# Altium PCB WEB_PCB.PcbDoc (part 1 of 2)
Units mil, origin at the board's own origin, x right, y up, seen from the top; angles counter-clockwise.
Board outline 3858.27 x 2755.91 mil, 2 copper layers (Top Layer, Bottom Layer); 107 components, 108 nets, 503 pads, 381 vias.
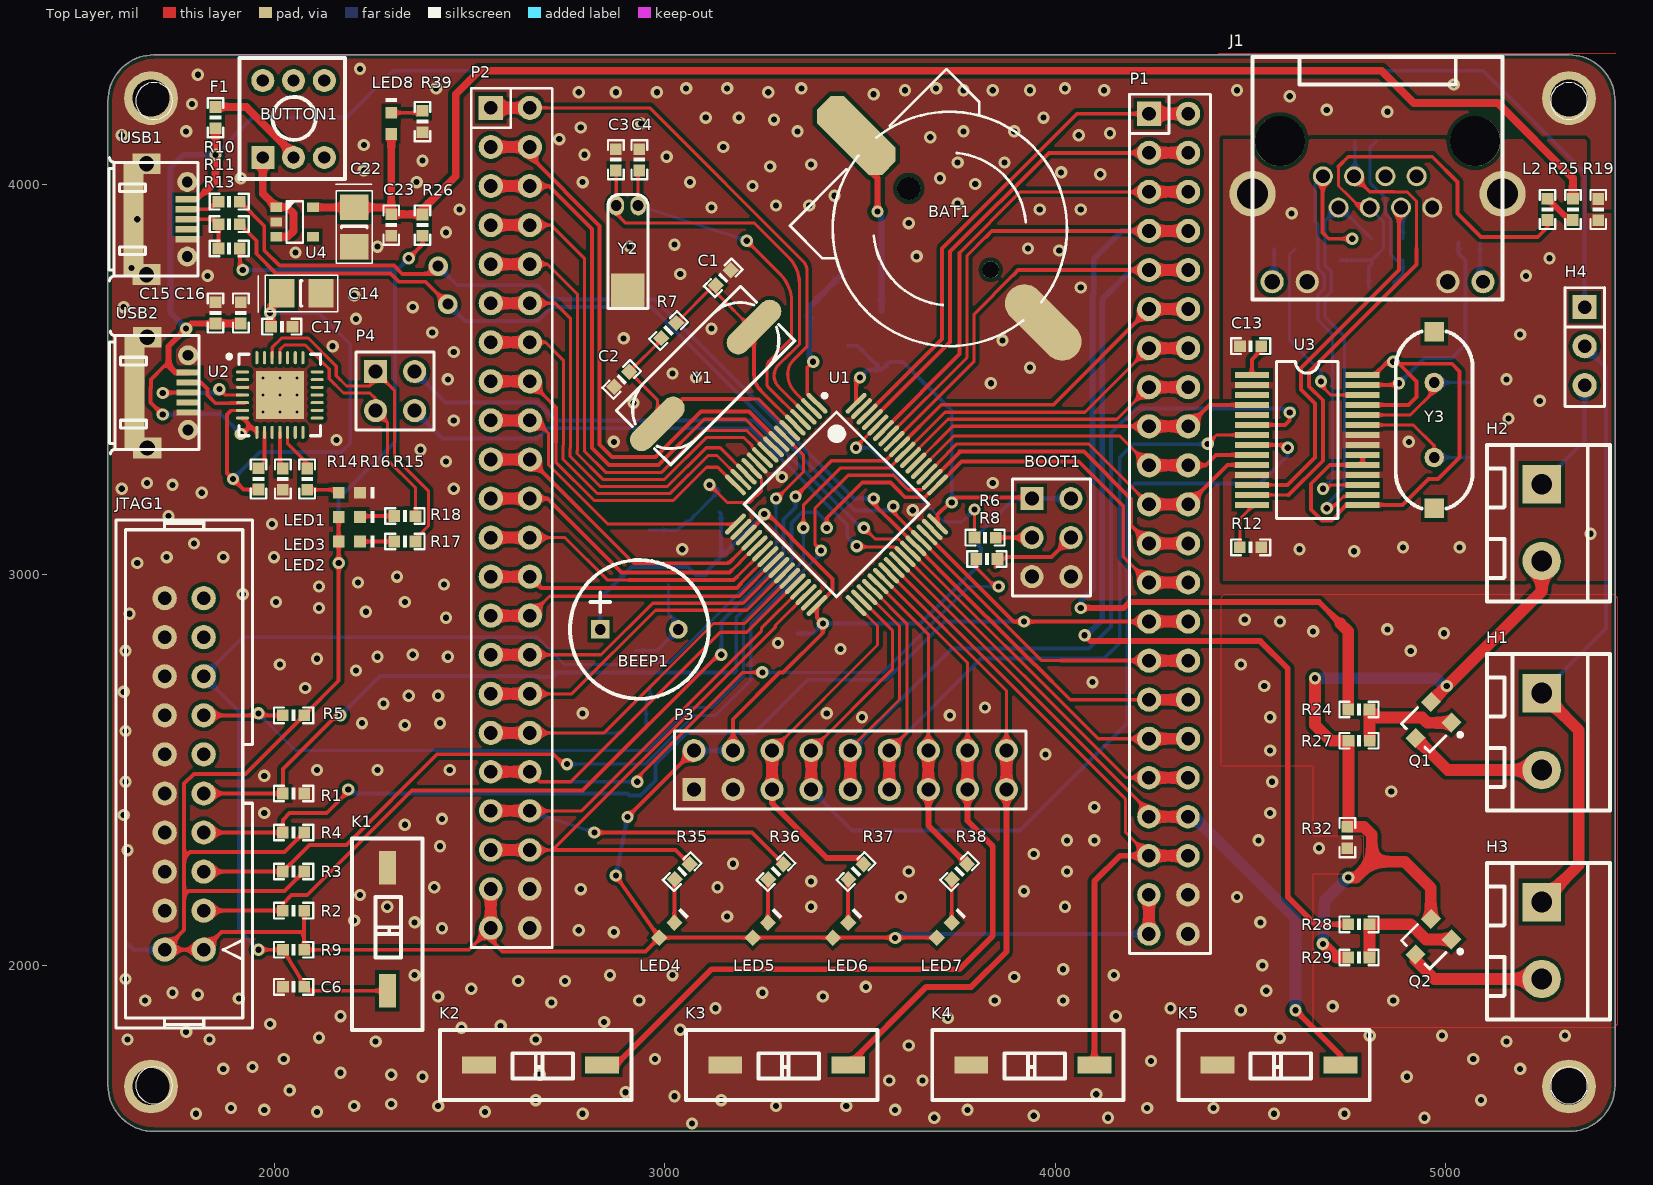
[diagram p0: Top Layer view]
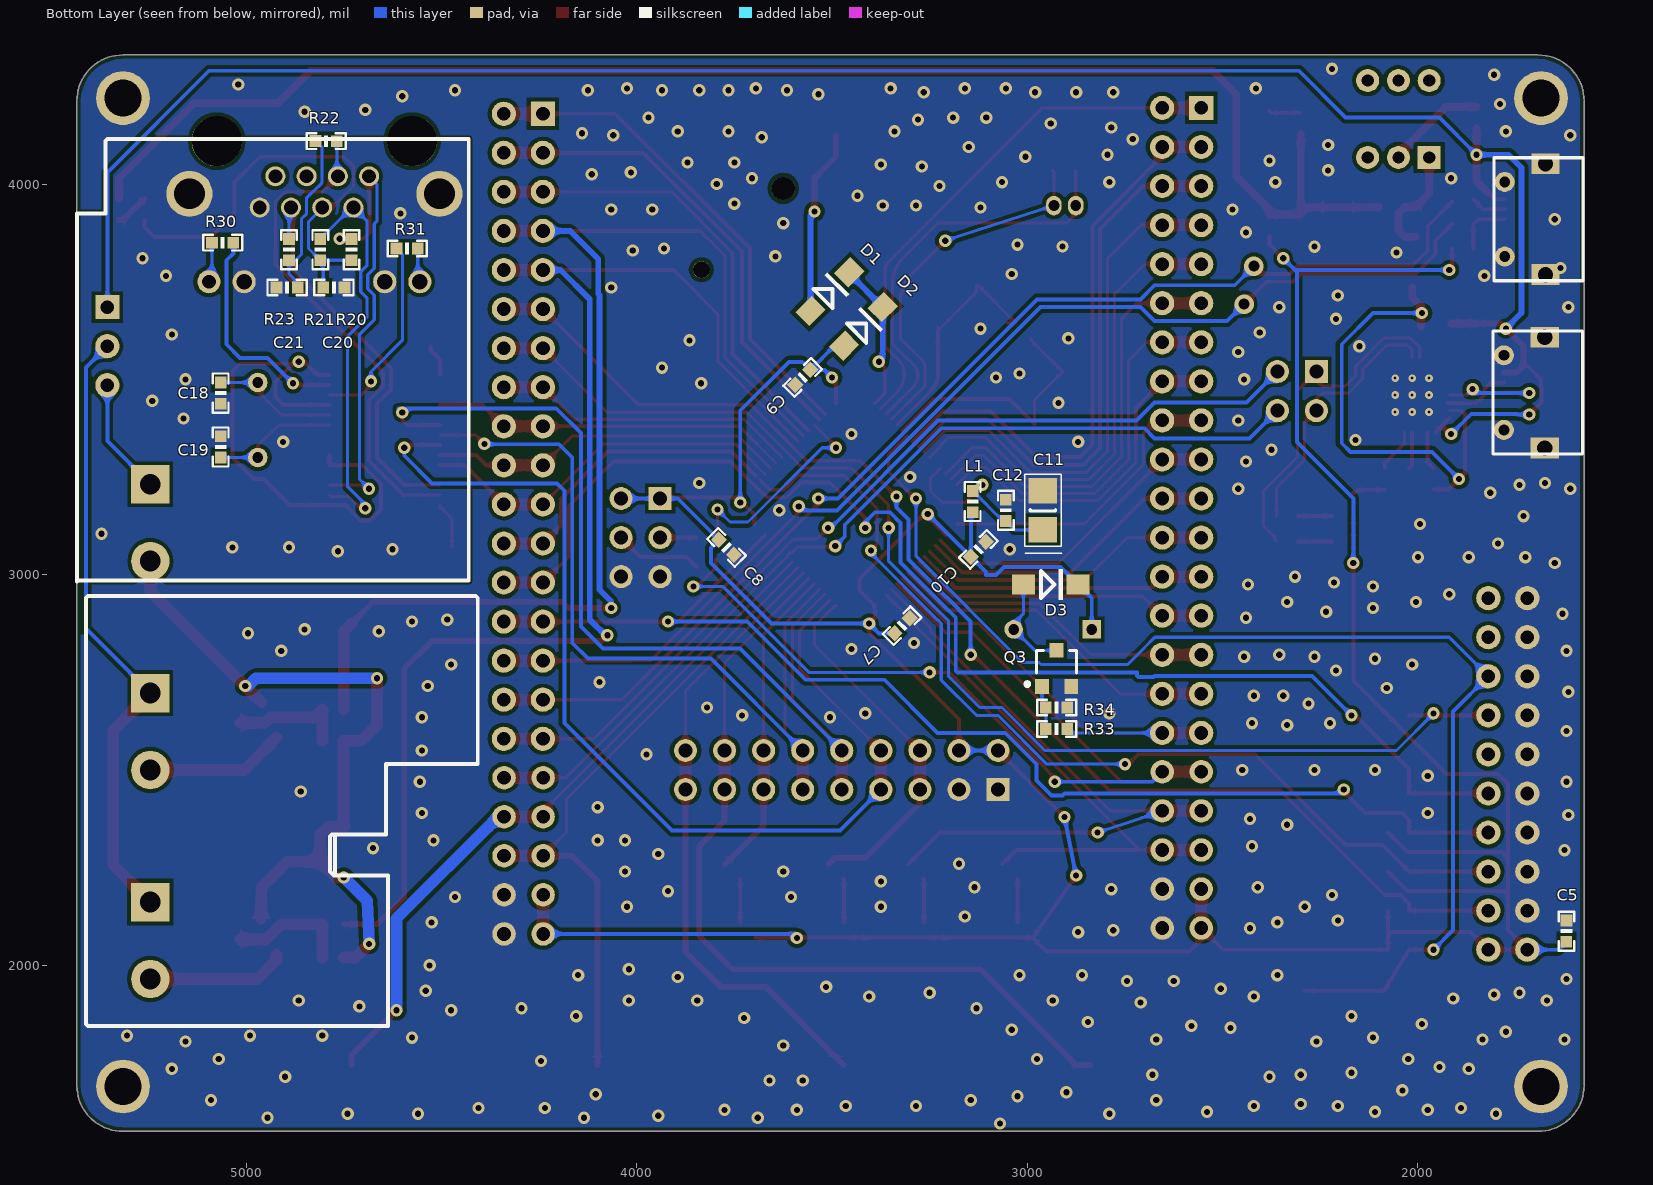
[diagram p1: Bottom Layer view, seen from below]

## Layer stack, top to bottom
Top Solder: solder mask 0.4, Solder Resist, Dk 3.5
Top Layer: signal copper 1.4
Dielectric 1: dielectric 12.6, FR-4, Dk 4.8
Bottom Layer: signal copper 1.4
Bottom Solder: solder mask 0.4, Solder Resist, Dk 3.5

## Board outline
1574.8,1692.91 1574.8,4212.6 cw(c1692.91,4212.6) 1692.91,4330.71 5314.96,4330.71 cw(c5314.96,4212.6) 5433.07,4212.6 5433.07,1692.91 cw(c5314.96,1692.91) 5314.96,1574.8 1692.91,1574.8 cw(c1692.91,1692.91)

## Design rules (kind name [scope] priority, off if disabled: settings)
Clearance Clearance_3 [HasFootprint('SSOP28') vs HasFootprint('SSOP28')] p1: gap=10
Clearance Clearance_2 [HasFootprint('STM-LQFP64_N')] p2: gap=10 except(5: SMDPad-SMDPad; 8: Track-SMDPad; 9: Track-Track)
Clearance Clearance_1 [HasFootprint('USB-MICRO-5P-2') vs HasFootprint('USB-MICRO-5P-2')] p3: gap=10 except(8: SMDPad-SMDPad)
Clearance [All] p4: gap=10
DiffPairsRouting DiffPairsRouting_1 [InDifferentialPairClass('USART_Class')] p1: maxlimit=10 minlimit=10 mostfreqgap=10 toplayer_minwidth=8 toplayer_maxwidth=15 toplayer_prefwidth=15 bottomlayer_minwidth=8 bottomlayer_maxwidth=15 bottomlayer_prefwidth=15 maxuncoupledlength=500
DiffPairsRouting [All] p2: maxlimit=10 minlimit=10 mostfreqgap=10 toplayer_minwidth=15 toplayer_maxwidth=15 toplayer_prefwidth=15 bottomlayer_minwidth=15 bottomlayer_maxwidth=15 bottomlayer_prefwidth=15 maxuncoupledlength=500
HoleSize [All] p1: absolutevalues=TRUE maxlimit=10000 minlimit=1 maxpercent=80.000 minpercent=20.000
MinimumSolderMaskSliver MinimumSolderMaskSliver_5 [HasFootprint('XTAL32') vs HasFootprint('XTAL32')] p1: minsoldermaskwidth=5
MinimumSolderMaskSliver MinimumSolderMaskSliver_4 [HasFootprint('SOT23-5') vs HasFootprint('SOT23-5')] p2: minsoldermaskwidth=5
MinimumSolderMaskSliver MinimumSolderMaskSliver_3 [HasFootprint('SLAB-QFN-28-3125x3125TP_N') vs HasFootprint('SLAB-QFN-28-3125x3125TP_N')] p3: minsoldermaskwidth=2
MinimumSolderMaskSliver MinimumSolderMaskSliver_2 [HasFootprint('SSOP28') vs HasFootprint('SSOP28')] p4: minsoldermaskwidth=2
MinimumSolderMaskSliver MinimumSolderMaskSliver_1 [HasFootprint('USB-MICRO-5P-2')] p5: minsoldermaskwidth=1
MinimumSolderMaskSliver [All] p6: minsoldermaskwidth=10
PolygonConnect [All] p1: connectstyle=Direct reliefconductorwidth=10 reliefentries=4 polygonreliefangle="90 Angle" airgapwidth=10
RoutingVias [All] p1: holewidth=28 width=50 viastyle="Through Hole" minholewidth=28 minwidth=50 maxholewidth=28 maxwidth=50
SilkToSilkClearance SilkToSilkClearance_1 [All] p1: silktosilkclearance=0
SilkToSilkClearance [All] p2: silktosilkclearance=10
SilkToSolderMaskClearance SilkToSolderMaskClearance_1 [IsPad] p1: minsilkscreentomaskgap=0 clearancetoexposedcopper=TRUE
SilkToSolderMaskClearance [IsPad] p2: minsilkscreentomaskgap=10 clearancetoexposedcopper=TRUE
SolderMaskExpansion [All] p1: expansion=4
Width Width_1 [InNetClass('NETS_Power')] p1: maxlimit=10000 minlimit=8 preferedwidth=20
Width [All] p2: maxlimit=99999 minlimit=8 preferedwidth=10
25 further rules are at their usual default settings.

## Classes and differential pairs
component class mcu_sys_sch: BAT1 BOOT1 C1 C2 C3 C4 C5 C6 C7 C8 C9 C10 C11 C12 D1 D2 JTAG1 K1 L1 P1 P2 P3 R1 R2 R3 R4 R5 R6 R7 R8 R9 U1 Y1 Y2
component class web_sch: BEEP1 BUTTON1 C13 C14 C15 C16 C17 C18 C19 C20 C21 C22 C23 D3 F1 H1 H2 H3 H4 J1 K2 K3 K4 K5 L2 LED1 LED2 LED3 LED4 LED5 LED6 LED7 LED8 P4 Q1 Q2 Q3 R10 R11 R12 R13 R14 R15 R16 R17 R18 R19 R20 R21 R22 R23 R24 R25 R26 R27 R28 R29 R30 R31 R32 R33 R34 R35 R36 R37 R38 R39 U2 U3 U4 USB1 USB2 Y3
differential pair class USART_Class: CP_USART NewDifferentialPair1 UART

## Components (designator, comment, footprint, x,y, rotation, side; value= is the part's Value field where it differs from the comment)
BAT1 "BATT" BATM 3730,3885 r225 top locked
BEEP1 "BEEP" BELL-5 2835,2860 r0 top locked
BOOT1 "Header 3X2" HDR2X3 3940,3195 r270 top
BUTTON1 "BUTTON2" BTN8.5*8.5 1971.26,4068.15 r90 top
C1 "22" 0603P 3150,3760 r225 top
C2 "22" 0603P 2890,3499.91 r45 top
C3 "22" 0603P 2875.06,4062.5 r270 top
C4 "22" 0603P 2935.06,4062.5 r270 top
C5 "104" 0603P 1620.06,2087.5 r90 bottom
C6 "104" 0603P 2050,1945 r0 top
C7 "104" 0603P 3320.51,2869.4 r315 bottom
C8 "104" 0603P 3770,3070 r45 bottom
C9 "104" 0603P 3575,3505 r135 bottom
C10 "104" 0603P 3125,3065 r315 bottom
C11 "10uF" TAJ_A 2960,3165 r90 bottom
C12 "104" 0603P 3055,3165 r270 bottom
C13 "104" 0603P 4500,3585 r0 top
C14 "4.7u" TAJ_A 2070,3720 r0 top
C15 "1u" 0603P 1850,3670 r90 top
C16 "0.1u" 0603P 1915,3670 r90 top
C17 "0.1u" 0603P 2020,3635 r180 top
C18 "22" 0603P 5064.87,3465 r270 bottom
C19 "22" 0603P 5065,3327 r90 bottom
C20 "104" 0603P 4775,3735 r0 bottom
C21 "104" 0603P 4895,3735.06 r180 bottom
C22 "10uF" TAJ_A 2205,3890 r270 top
C23 "104" 0603P 2300,3895 r90 top
D1 "1N4148" DIODE_SOP 3555,3675 r135 bottom
D2 "1N4148" DIODE_SOP 3468.99,3586.01 r135 bottom
D3 "1N4148" DIODE_SOP 3010,2975 r180 bottom
F1 "Fuse 1" 0603P 1850,4170 r90 top
H1 "HEAD2" HEAD2L-0.8 5245,2696.85 r270 top
H2 "HEAD2" HEAD2L-0.8 5245,3231.85 r270 top
H3 "HEAD2" HEAD2L-0.8 5245,2161.85 r270 top
H4 "Header 3" HEAD3 5354.57,3685.43 r270 top
J1 "RJ45" RJ8-1 4685,4020 r0 top locked
JTAG1 "JTAG" JTAG_20 1770,2490 r90 top
K1 "KEY" KEY2 2290,2250 r270 top
K2 "KEY" KEY2 2839.96,1745 r180 top
K3 "KEY" KEY2 3469.97,1745 r180 top
K4 "KEY" KEY2 4099.99,1745 r180 top
K5 "KEY" KEY2 4730,1745 r180 top
L1 "221" 0603P 3139.94,3187.5 r270 bottom
L2 "100uH" 0603P 5260,3935 r90 top
LED1 "LED" LED_0603 2192.5,3210.13 r0 top
LED2 "LED" LED_0603 2192.5,3085.06 r0 top
LED3 "LED" LED_0603 2192.5,3147.6 r0 top
LED4 "LED" LED_0603 3005.51,2090 r45 top
LED5 "LED" LED_0603 3245,2090 r45 top
LED6 "LED" LED_0603 3450,2090 r45 top
LED7 "LED" LED_0603 3715.51,2090 r45 top
LED8 "LED" LED_0603 2300,4155 r90 top
P1 "HEAD2*22" HEAD2*22 4239.57,4180.43 r270 top locked
P2 "HEAD2*22" HEAD2*22 2554.57,4195.43 r270 top
P3 "Header 9X2" HDR2X9 3075,2450 r0 top
P4 "Header 2X2" HDR2X2 2260,3520 r270 top
Q1 "MOSFET-N" SOT-23 4955,2615 r135 top
Q2 "MOSFET-N" SOT-23 4955,2060 r135 top
Q3 "MOSFET-P" SOT-23 2925,2760 r180 bottom
R1 "10K" 0603P 2050,2440 r180 top
R2 "10K" 0603P 2050,2140 r180 top
R3 "10K" 0603P 2050,2240 r180 top
R4 "10K" 0603P 2050,2340 r180 top
R5 "10K" 0603P 2050,2640 r180 top
R6 "10K" 0603P 3820,3095 r0 top
R7 "1M" 0603P 3010,3625 r45 top
R8 "10K" 0603P 3825,3040 r180 top
R9 "10K" 0603P 2050,2040 r0 top
R10 "33" 0603P 1885,3955 r0 top
R11 "33" 0603P 1885,3897.5 r0 top
R12 "2.32k" 0603P 4500,3070 r180 top
R13 "1.5K" 0603P 1885,3835 r0 top
R14 "10K" 0603P 1960,3245 r90 top
R15 "10K" 0603P 2085,3245 r270 top
R16 "10K" 0603P 2022.56,3245 r270 top
R17 "470" 0603P 2335,3085 r180 top
R18 "470" 0603P 2335,3150 r180 top
R19 "0" 0603P 5390,3935 r270 top
R20 "50" 0603P 4730,3832 r90 bottom
R21 "50" 0603P 4810,3832 r90 bottom
R22 "50" 0603P 4795,4110 r180 bottom
R23 "50" 0603P 4890,3832 r90 bottom
R24 "10K" 0603P 4777.5,2655 r180 top
R25 "0" 0603P 5324.94,3935 r90 top
R26 "0" 0603P 2380.06,3895 r270 top
R27 "100K" 0603P 4777.5,2575 r0 top
R28 "10K" 0603P 4777.5,2105 r180 top
R29 "100K" 0603P 4777.5,2020 r180 top
R30 "510" 0603P 5060,3850 r180 bottom
R31 "510" 0603P 4587.5,3834.94 r0 bottom
R32 "0" 0603P 4747.44,2327 r90 top
R33 "10K" 0603P 2925,2605 r0 bottom
R34 "100K" 0603P 2925,2660 r0 bottom
R35 "510" 0603P 3045,2240 r225 top
R36 "510" 0603P 3285,2240 r225 top
R37 "510" 0603P 3490,2240 r225 top
R38 "510" 0603P 3755,2240 r225 top
R39 "1K" 0603P 2380,4160 r90 top
U1 "STM32F103RCT6" STM-LQFP64_N 3440,3180 r315 top locked
U2 "CP2102-GM" SLAB-QFN-28-3125x3125TP_N 2015,3460 r0 top
U3 "ENC28J60" SSOP28 4645,3345 r0 top locked
U4 "SPX3819" SOT23-5 2053,3903 r0 top
USB1 "" USB-MICRO-5P-2 1777.8,3961.18 r90 top
USB2 "" USB-MICRO-5P-2 1780,3517.36 r90 top
Y1 "8MHz" X-SM49 3105,3510 r225 top
Y2 "32.768K" XTAL32 2932,3945 r270 top locked
Y3 "25MHz" XTAL_US 4970,3300 r90 top

## Footprints (in the part's own frame and the unit in brackets; to place one, negate y for a bottom-side part, rotate by r counter-clockwise, add the part's x,y. Pads: shape width x height; smd on the part's side, far side on the other; paste and mask are expansions set on the pad)
0603P [mil]
  rect 30x30 smd: 1(-27,0) 2(27.5,-0.06)
  silkscreen extent -50,-20 50,20
BATM [mm]
  round 1.1 hole 1.1 unplated: 0(0,3.748)
  round 1.5 hole 1.5 unplated: 0(0.025,-3.752)
  oct 2.5x6 smd: 1(0,-8.602)
  oval 2.5x6 smd: 2(0,8.598)
  silkscreen extent -7.62,-7.58 7.62,7.57
BELL-5 [mm]
  rect 1.2x1.2 hole 0.7: 1(0,0)
  round 1.2 hole 0.7: 2(5.08,0)
  silkscreen extent -1.97,-4.51 7.05,4.51
BTN8.5*8.5 [mm]
  rect 1.5x1.5 hole 0.8: 1(0,0)
  round 1.5 hole 0.8: 2(0,-2) 3(0,-4) 4(5,-4) 5(5,-2) 6(5,0)
  silkscreen extent -1.4,-5.33 6.48,1.52
DIODE_SOP [mm]
  rect 1.5x1.3 smd: 1(0,0) 2(3.556,0)
  silkscreen extent 1.14,-1.02 2.56,1.02
HDR2X2 [mm]
  rect 1.5x1.5 hole 0.9: 1(0,0)
  round 1.5 hole 0.9: 2(0,2.54) 3(2.54,0) 4(2.54,2.54)
  silkscreen extent -1.27,-1.27 3.81,3.81
HDR2X3 [mm]
  rect 1.5x1.5 hole 0.9: 1(0,0)
  round 1.5 hole 0.9: 2(0,2.54) 3(2.54,0) 4(2.54,2.54) 5(5.08,0) 6(5.08,2.54)
  silkscreen extent -1.27,-1.27 6.35,3.81
HDR2X9 [mm]
  rect 1.5x1.5 hole 0.9: 1(0,0)
  round 1.5 hole 0.9: 2(0,2.54) 3(2.54,0) 4(2.54,2.54) 5(5.08,0) 6(5.08,2.54) 7(7.62,0) 8(7.62,2.54) 9(10.16,0) 10(10.16,2.54) 11(12.7,0) 12(12.7,2.54) 13(15.24,0) 14(15.24,2.54) 15(17.78,0) 16(17.78,2.54) 17(20.32,0) 18(20.32,2.54)
  silkscreen extent -1.27,-1.27 21.59,3.81
HEAD2*22 [mil]
  rect 62x62 hole 35: 1(0.43,0.43)
  round 62 hole 35: 2(0.43,100.43) 3(100.43,0.43) 4(100.43,100.43) 5(200.43,0.43) 6(200.43,100.43) 7(300.43,0.43) 8(300.43,100.43) 9(400.43,0.43) 10(400.43,100.43) 11(500.43,0.43) 12(500.43,100.43) 13(600.43,0.43) 14(600.43,100.43) 15(700.43,0.43) 16(700.43,100.43) 17(800.43,0.43) 18(800.43,100.43) 19(900.43,0.43) 20(900.43,100.43) 21(1000.43,0.43) 22(1000.43,100.43) 23(1100.43,0.43) 24(1100.43,100.43) 25(1200.43,0.43) 26(1200.43,100.43) 27(1300.43,0.43) 28(1300.43,100.43) 29(1400.43,0.43) 30(1400.43,100.43) 31(1500.43,0.43) 32(1500.43,100.43) 33(1600.43,0.43) 34(1600.43,100.43)
  round 60 hole 35: 35(1700,0) 36(1700,100) 37(1800,0) 38(1800,100) 39(1900,0) 40(1900,100) 41(2000,0) 42(2000,100) 43(2100,0) 44(2100,100)
  silkscreen extent -50,-50 2150,157
HEAD2L-0.8 [mm]
  rect 2.5x2.5 hole 1.35: 1(0,0)
  round 2.5 hole 1.35: 2(5,0)
  silkscreen extent -2.54,-3.56 7.62,4.45
HEAD3 [mil]
  rect 62x62 hole 35: 1(0.43,0.43)
  round 62 hole 35: 2(100.43,0.43) 3(200.43,0.43)
  silkscreen extent -50,-50 255,51
JTAG_20 [mil]
  round 62 hole 35: 1(-450,-50) 2(-450,50) 3(-350,-50) 4(-350,50) 5(-250,-50) 6(-250,50) 7(-150,-50) 8(-150,50) 9(-50,-50) 10(-50,50) 11(50,-50) 12(50,50) 13(150,-50) 14(150,50) 15(250,-50) 16(250,50) 17(350,-50) 18(350,50) 19(450,-50) 20(450,50)
  silkscreen extent -650,-175 650,175
KEY2 [mm]
  rect 2.2x1.1 smd: 1(0,0) 2(8,0)
  silkscreen extent -1.91,-2.29 10.54,2.29
LED_0603 [mil]
  rect 30x30 smd: 1(-27,0) 2(27.5,-0.06)
  silkscreen extent 55,-15 65,15
RJ8-1 [mm] "网络"
  round 1.3 hole 0.9: 1(0,0) 2(1.016,-2.032) 3(2.032,0) 4(3.048,-2.032) 5(4.064,0) 6(5.08,-2.032) 7(6.096,0) 8(7.112,-2.032)
  round 1.5 hole 1: 9(-3.302,-6.858) 10(-1.016,-6.858) 11(8.128,-6.858)
  round 1.5 hole 0.9: 12(10.414,-6.858)
  round 3 hole 2: 13(-4.572,-1.143) 14(11.684,-1.143)
  round 3.251 hole 3.251: 15(-2.794,2.286) 16(9.906,2.286)
  silkscreen extent -4.57,-8 11.68,7.75
SLAB-QFN-28-3125x3125TP_N [mm] "QFN, 28-Leads, Body 5x5mm, Pitch 0.5mm, Thermal Pad 3.13x3.13mm, IPC Medium Density"
  oval 0.85x0.2 smd: 1(-2.425,1.5) 2(-2.425,1) 3(-2.425,0.5) 4(-2.425,0) 5(-2.425,-0.5) 6(-2.425,-1) 7(-2.425,-1.5) 15(2.425,-1.5) 16(2.425,-1) 17(2.425,-0.5) 18(2.425,0) 19(2.425,0.5) 20(2.425,1) 21(2.425,1.5)
  oval 0.2x0.85 smd: 8(-1.5,-2.425) 9(-1,-2.425) 10(-0.5,-2.425) 11(0,-2.425) 12(0.5,-2.425) 13(1,-2.425) 14(1.5,-2.425) 22(1.5,2.425) 23(1,2.425) 24(0.5,2.425) 25(0,2.425) 26(-0.5,2.425) 27(-1,2.425) 28(-1.5,2.425)
  rect 3.13x3.13 smd: 29(0,0)
  silkscreen extent -3.42,-2.65 2.65,2.65, body extent -2.5,-2.5 2.5,2.5, height 1
SOT23-5 [mil]
  rect 30x24 smd: 1(-47,38) 2(-47,0) 3(-47,-38) 4(47,-38) 5(47,38)
  silkscreen extent -21,-53 21,53, body extent -55,-57 55,57, height 57
SOT-23 [mm]
  rect 0.9x0.95 smd: 1(-0.95,-1.175) 2(0.95,-1.175) 3(0,1.175)
  silkscreen extent -2.03,-1.14 1.3,1.18
SSOP28 [mm]
  rect 2.2x0.38 smd: 1(-3.6,4.225) 2(-3.6,3.575) 3(-3.6,2.925) 4(-3.6,2.275) 5(-3.6,1.625) 6(-3.6,0.975) 7(-3.6,0.325) 8(-3.6,-0.325) 9(-3.6,-0.975) 10(-3.6,-1.625) 11(-3.6,-2.275) 12(-3.6,-2.925) 13(-3.6,-3.575) 14(-3.6,-4.225) 15(3.6,-4.225) 16(3.6,-3.575) 17(3.6,-2.925) 18(3.6,-2.275) 19(3.6,-1.625) 20(3.6,-0.975) 21(3.6,-0.325) 22(3.6,0.325) 23(3.6,0.975) 24(3.6,1.625) 25(3.6,2.275) 26(3.6,2.925) 27(3.6,3.575) 28(3.6,4.225)
  silkscreen extent -2,-5.1 2,5.1
STM-LQFP64_N [mm] "Thin QFP, 64-Leads, Body 10x10mm, Pitch 0.5mm, IPC Medium Density"
  oval 1.8x0.3 smd: 1(-5.55,3.75) 2(-5.55,3.25) 3(-5.55,2.75) 4(-5.55,2.25) 5(-5.55,1.75) 6(-5.55,1.25) 7(-5.55,0.75) 8(-5.55,0.25) 9(-5.55,-0.25) 10(-5.55,-0.75) 11(-5.55,-1.25) 12(-5.55,-1.75) 13(-5.55,-2.25) 14(-5.55,-2.75) 15(-5.55,-3.25) 16(-5.55,-3.75) 33(5.55,-3.75) 34(5.55,-3.25) 35(5.55,-2.75) 36(5.55,-2.25) 37(5.55,-1.75) 38(5.55,-1.25) 39(5.55,-0.75) 40(5.55,-0.25) 41(5.55,0.25) 42(5.55,0.75) 43(5.55,1.25) 44(5.55,1.75) 45(5.55,2.25) 46(5.55,2.75) 47(5.55,3.25) 48(5.55,3.75)
  oval 0.3x1.8 smd: 17(-3.75,-5.55) 18(-3.25,-5.55) 19(-2.75,-5.55) 20(-2.25,-5.55) 21(-1.75,-5.55) 22(-1.25,-5.55) 23(-0.75,-5.55) 24(-0.25,-5.55) 25(0.25,-5.55) 26(0.75,-5.55) 27(1.25,-5.55) 28(1.75,-5.55) 29(2.25,-5.55) 30(2.75,-5.55) 31(3.25,-5.55) 32(3.75,-5.55) 49(3.75,5.55) 50(3.25,5.55) 51(2.75,5.55) 52(2.25,5.55) 53(1.75,5.55) 54(1.25,5.55) 55(0.75,5.55) 56(0.25,5.55) 57(-0.25,5.55) 58(-0.75,5.55) 59(-1.25,5.55) 60(-1.75,5.55) 61(-2.25,5.55) 62(-2.75,5.55) 63(-3.25,5.55) 64(-3.75,5.55)
  silkscreen extent -5.67,-4.25 4.25,4.57, body extent -5,-5 5,5, height 1.6
TAJ_A [mm] "Chip Capacitor, 2-Leads, Body 3.2x1.7mm, IPC Medium Density"
  rect 1.65x1.85 smd: 1(-1.275,0) 2(1.275,0)
  silkscreen extent -2.79,-1.21 2.35,1.17, body extent -1.7,-0.9 1.7,0.9, height 1.8
USB-MICRO-5P-2 [mm]
  round 1.3 hole 0.7: 0(-3.725,0) 0(1.125,0)
  rect 0.4x1.5 smd: 1(0,0) 2(-0.65,0) 3(-1.3,0) 4(-1.95,0) 5(-2.6,0)
  rect 1.35x1.85 hole 1: 6(2.3,2.65) 7(-4.9,2.65)
  rect 7.35x1.3 smd: 8(-1.3,3.5)
  silkscreen extent -5.3,-0.7 2.7,5.1
X-SM49 [mm]
  oval 4.4x1.5 smd: 1(4.45,0.004) 2(-4.45,-0.004)
  silkscreen extent -5.7,-2.5 5.72,2.5
XTAL32 [mil]
  oval 50x40 hole 28: 1(0,0) 2(0,-56)
  rect 92.13x86 smd: ""(220,-27)
  silkscreen extent -28,-77 264,25
XTAL_US [mil]
  round 50 hole 28: 1(0,0) 2(192.13,0)
  rect 50x50 smd: ""(-130.32,0) ""(322.44,0)
  silkscreen extent -131,-98 323,98

## Part data
BAT1: library part BAT
BOOT1: "Header, 3-Pin, Dual row"
C1 C2 C3 C4 C5 C6 C7 C8 C9 C10 C12 C13 C15 C16 C17 C18 C19 C20 C21 C23: library part C
C11 C14 C22: library part CAP
D1 D2 D3: library part D
F1: "Fuse"
J1: library part HR911105
L1 L2: library part Inductor
LED1 LED2 LED3 LED4 LED5 LED6 LED7 LED8: "Typical RED, GREEN, YELLOW, AMBER GaAs LED"
P3: "Header, 9-Pin, Dual row"
P4: "Header, 2-Pin, Dual row"
Q1 Q2: "N-Channel MOSFET"
Q3: "P-Channel MOSFET"
R1 R2 R3 R4 R5 R6 R7 R8 R9 R10 R11 R12 R13 R14 R15 R16 R17 R18 R19 R20 R21 R22 R23 R24 R25 R26 R27 R28 R29 R30 R31 R32 R33 R34 R35 R36 R37 R38 R39: library part R
U2: "Single-Chip USB to UART Bridge, 1024 Bytes EEPROM, -40 to 85 degC, 28-pin QFN, Tube"
USB1 USB2: library part USB5
Y1 Y2 Y3: library part XTAL, "Crystal Oscillator"

## Free pads (board coordinates)
  round 137.8 hole 94.49: 0(1685,1690) 0(1685,4220) 0(5315,1690) 0(5315,4220)

## Via types
v1: diameter 31.5, hole 15.75, Top Layer to Bottom Layer, 370 vias
v2: diameter 19.68, hole 7.87, Top Layer to Bottom Layer, 9 vias
v3: diameter 50, hole 28, Top Layer to Bottom Layer, 2 vias

## Nets (pads, with @x,y where several pads share a name; then routed paths per layer and width w, separated by ;. In a path a pad name is that pad's centre, name@x,y a point inside that pad or via, vN(x,y) a via of type N, cw(c..) or ccw(c..) an arc to the next point about the centre after c; other vN are vias at no path point)
BEEP: P2.33 P2.34 R33.1 U1.27 | length 1176.3
  Top Layer w8: P2.34@2655,2595 2845,2595 3125,2875 3204.6,2875 U1.27@3320.29,2990.7
  Top Layer w30: P2.33@2555,2595 P2.34@2655,2595
  Bottom Layer w8: P2.34@2655,2595 2888,2595 R33.1@2898,2605
BOOT0: R6.1 U1.60 | length 552.5
  Top Layer w8: v1(3490,3325) 3490,3327.44 U1.60@3545.79,3383.22 ; v1@3790,3170 v1(3793,3167) R6.1@3793,3095
  Bottom Layer w8: v1(3490,3325) 3525,3325 3715,3135 3761,3135 v1(3793,3167)
BOOT1: P2.35 P2.36 R8.2 U1.28 | length 2532.9
  Top Layer w8: P2.36@2654.57,2495.43 2680,2470 2760,2470 3142.56,2852.56 3210,2852.56 U1.28@3334.21,2976.78 ; v1(2930,2470) 2930,2480 3200,2750 v1(3250,2750) ; R8.2@3797.5,3040.06 3797.5,3017.5 3855,2960 v1@3860,2960
  Top Layer w30: P2.35@2554.57,2495.43 P2.36@2654.57,2495.43
  Bottom Layer w8: P2.36@2654.57,2495.43 2680,2470 v1(2930,2470) ; v1(3250,2750) 3560,2750 3780,2970 v1(3855,2970)
CP_3V3: C14.1 C17.2 R14.1 U2.6 | length 1230
  Top Layer w8: 1888.98,3418.98 1889.98,3419.98 1906.17,3419.98 1906.76,3420.57 U2.6@1919.53,3420.63
  Top Layer w10: 1888.98,3418.98 1880,3410 1880,3260 v1(1895,3245) 1922,3218 R14.1@1960,3218
  Top Layer w20: C17.2@1992.5,3635.06 1992.5,3687.5 2014.8,3709.8 C14.1@2014.8,3735
  Bottom Layer w10: v1(1895,3245) 1964.25,3314.25 2172.74,3314.25 2195,3336.52 2195,3590 2115,3670 v1(1990,3670)
CP_RXD: P4.3 R18.1 U2.25 | length 684.6
  Top Layer w8: U2.25@2015,3555.47 2015,3576.2 2026.8,3588 2079.69,3588 2102.25,3565.44 2102.25,3565.22 2130.22,3537.25 2130.44,3537.25 2141.2,3526.48 2141.2,3501.8 2178,3465 2245,3465 2260,3450 P4.3@2260,3420 2290,3390 2290,3294.54 2362,3222.54 R18.1@2362,3150
CP_TXD: P4.1 R17.1 U2.26 | length 899.5
  Top Layer w8: U2.26@1995.32,3555.47 1995.32,3581.98 2019.34,3606 2087.15,3606 2120.25,3572.89 2120.25,3572.68 2137.68,3555.25 2137.89,3555.25 2159.2,3533.94 2159.2,3509.25 2185.46,3483 2245,3483 2260,3498 P4.1@2260,3520 2308,3472 2308,3302 2395,3215 2395,3124.54 2366,3095.54 2366,3089 R17.1@2362,3085
D+: U2.4 USB2.3 | length 301.5
  Top Layer w8: v1(1860,3475) 1875,3460 U2.4@1919.53,3460
  Top Layer w10: v1(1715,3465) 1716.18,3466.18 USB2.3@1780,3466.18
  Bottom Layer w10: v1(1715,3465) 1870.55,3465 1860.55,3475 v1(1860,3475)
D-: U2.5 USB2.2 | length 176.2
  Top Layer w10: USB2.2@1780,3491.77 1813.23,3491.77 1829.25,3475.75 1829.25,3460.28 1850.55,3438.98 1888.01,3438.98 1888.56,3439.53 1898.85,3439.53 U2.5@1925,3439.57
DR_CH1: P1.7 P1.8 R24.2 U1.58 | length 3137.2
  Top Layer w8: U1.58@3573.63,3355.38 3774.08,3555.84 3774.08,3816.71 3822.37,3865
  Top Layer w10: 3822.37,3865 3837.37,3880 P1.7@4240,3880
  Top Layer w15: v1(4065,2915) 4175,2915 4190,2930 4675,2930 4730,2875
  Top Layer w30: P1.7@4240,3880 P1.8@4340,3880 ; 4730,2875 4750,2855 R24.2@4750,2655.06
  Bottom Layer w15: v1(4065,2915) 4065,2931.47 4095,2961.47 4095,3715.36 4098.25,3718.6 4098.25,3808.25 4170,3880 P1.7@4240,3880
DR_CH2: P1.9 P1.10 R28.2 U1.57 | length 3361.8
  Top Layer w8: U1.57@3587.55,3341.47 3792.08,3546 3792.08,3667.08 3892.5,3767.5
  Top Layer w10: 3892.5,3767.5 3905,3780 P1.9@4240,3780
  Top Layer w15: v1(4075,2845) 4090,2830 4525,2830 4595,2760 4595,2175 4664.94,2105.06 R28.2@4750,2105.06
  Top Layer w30: P1.9@4240,3780 P1.10@4340,3780
  Bottom Layer w15: v1(4075,2845) 4080,2845 4120,2885 4120,3705 4195,3780 P1.9@4240,3780
GND: BAT1.2 BOOT1.5 BOOT1.6 C1.1 C2.1 C3.1 C4.1 C5.2 C6.1 C7.1 C8.1 C9.1 C10.1 C11.2 C12.1 C14.2 C15.2 C16.2 C17.1 C22.2 C23.1 JTAG1.4 JTAG1.6 JTAG1.8 JTAG1.10 JTAG1.12 JTAG1.14 JTAG1.16 JTAG1.18 JTAG1.20 K1.1 K2.2 K3.2 K4.2 K5.2 LED1.2 P1.42 P1.44 P2.42 P2.44 P3.1 P3.3 pad.0 Q3.2 R1.1 R16.2 R19.1 R32.1 R34.1 R39.1 U1.12 U1.18 U1.31 U1.47 U1.63 U2.3 U2.29 U4.2 USB1.0 USB1.5 USB1.6 USB1.7 USB1.8 USB2.0 USB2.5 USB2.6 USB2.7 USB2.8 Y2.
  other v1: 3070,1595 3690,1610 4135,1610 4945,1610 3945,1615 1800,1620 2790,1620 4560,1620 4740,1620 2110,1625 2540,1625 1975,1630 3590,1630 3775,1630 1890,1635 4235,1635 4405,1635 2205,1640 2420,1640 3285,1640 3465,1640 2300,1645 2670,1655 3145,1655 5090,1655 3025,1665 4105,1670 2900,1675 2040,1680 3575,1705 3660,1705 2380,1715 4900,1715 2300,1720 2680,1720 2170,1725 1870,1735 5190,1735 1945,1740 4245,1755 2025,1760 2975,1760 5070,1760 3625,1795 2260,1805 5155,1805 1625,1810 1835,1810 2670,1810 2115,1815 4575,1815 4805,1820 4990,1820 5305,1820 1775,1830 3040,1835 2480,1840 2580,1845 1990,1850 2845,1855 3725,1865 2170,1870 4155,1870 4475,1885 3130,1890 4295,1890 4710,1895 2710,1905 1670,1910 2935,1910 3845,1910 4020,1910 4865,1910 1910,1915 2420,1920 3405,1920 1805,1925 1740,1930 3250,1930 4540,1935 2505,1940 3515,1945 2625,1960 2745,1960 1620,1965 3895,1970 2360,1975 2860,1975 3020,1975 4150,1975 4020,1990 4530,2000 2870,2085 2780,2090 2430,2095 2360,2110 4525,2110 2205,2115 3160,2125 2290,2150 3375,2150 4025,2150 3605,2175 4465,2175 2220,2180 3920,2190 2785,2195 2410,2200 3135,2200 3375,2215 3625,2240 4030,2240 3175,2260 3945,2285 1625,2295 4675,2300 2425,2305 4030,2320 4100,2320 4520,2320 2335,2360 2430,2375 1615,2385 1975,2390 4550,2390 4100,2405 4860,2445 1620,2470 4555,2470 1975,2485 2110,2500 2265,2500 2450,2500 3975,2540 4550,2550 1620,2600 2335,2615 2225,2620 2425,2620 3505,2635 4550,2635 3730,2640 2790,2645 3415,2645 3820,2660 2280,2670 2345,2690 2420,2690 1615,2700 2080,2710 4535,2715 4095,2725 2210,2755 2015,2770 4475,2770 2110,2785 2265,2790 2445,2790 2355,2795 1620,2805 4910,2805 3450,2810 3290,2825 4995,2850 4660,2855 4850,2860 4575,2880 4485,2885 2440,2890 1630,2900 2235,2905 2115,2915 2005,2930 2335,2930 1920,2950 2115,2970 2435,2975 2215,2980 2315,2995 1650,3030 1725,3045 1870,3045 2000,3045 3045,3065 1795,3080 1995,3130 1730,3150 3635,3165 1815,3210 1610,3220 2460,3220 1740,3230 1675,3235 3840,3235 3300,3250 2440,3290 2375,3320 2870,3340 2160,3345 3450,3360 2460,3395 2920,3440 3835,3490 2445,3500 3080,3505 3020,3515 3935,3530 2460,3570 2150,3585 3865,3600 2895,3605 2405,3620 3120,3630 2210,3655 1615,3685 2355,3685 2205,3715 4065,3735 1830,3765 3040,3770 1635,3785 3645,3815 2055,3825 4010,3830 3930,3835 2265,3839.8 2910,3840 3025,3845 2440,3876.29 3625,3900 1650,3910 2475,3935 3960,3935 4065,3935 3120,3940 3285,3945 3370,3945 3750,3950 3435,3970 3225,3995 3795,4000 2365,4005 2790,4005 3065,4005 1915,4015 3705,4015 4115,4025 4015,4030 2230,4035 3270,4045 3375,4050 3750,4055 3870,4055 2380,4060 3005,4070 2795,4075 3150,4095 2230,4100 2730,4115 3680,4120 1610,4125 4060,4125 4140,4130 1775,4135 3340,4135 3765,4135 3895,4135 2785,4145 2940,4155 3280,4165 3105,4170 3190,4170 3970,4170 4850,4185 4695,4190 1790,4205 4600,4225 3535,4230 2780,4235 2875,4235 2980,4235 3265,4235 3615,4240 3765,4240 3840,4240 3935,4240 4125,4240 4465,4240 2415,4245 3055,4245 3160,4245 3350,4245 3695,4245 4025,4245 5020,4255 1805,4280 2220,4295
  other v2: 1971.69,3416.69 2015,3416.69 2058.31,3416.69 1971.69,3460 2015,3460 2058.31,3460 1971.69,3503.31 2015,3503.31 2058.31,3503.31
GND_DR: H2.2 Q1.2 Q2.2 R27.1 R29.2 R32.2 | length 2010.7
  Top Layer w30: v1(4665,2735) 4665,2615 4705,2575 R27.1@4750.5,2575 R32.2@4750.5,2357.5 ; v1(4685,2055) 4719.94,2020.06 R29.2@4750,2020.06 ; R32.2@4747.5,2354.5 R32.2@4750.5,2357.5 ; v1@4755,2225 4770,2225 4810,2265 ; Q2.2@4961.26,2119.16 4961.26,2198.74 4895,2265 4810,2265 ; Q1.2@4961.26,2674.16 v1(5002.11,2715) 5245,2957.89 H2.2@5245,3035 ; R32.2@4750.5,2357.5 4753,2355 4790,2355 4810,2335 4810,2265
  Bottom Layer w30: v1(4665,2735) 4975,2735 4995,2715 v1(5002.11,2715) ; v1(4685,2055) 4690,2165 v1(4750,2225)
GND_ENC: C13.1 C18.2 C19.2 C20.1 C21.1 J1.8 J1.10 J1.11 J1.13 J1.14 R12.1 R19.2 U3.2 U3.11 U3.18 U3.21 U3.22
  other v1: 4765,3060 4625,3065 4890,3070 5035,3070 5370,3105 4905,3340 5160,3400 5240,3445 5155,3500 5190,3615 5205,3765 5265,3810 4605,3925
JTCLK: JTAG1.9 P1.25 P1.26 R1.2 U1.49 | length 3347.9
  Top Layer w10: JTAG1.9@1820,2440 2022.44,2440 R1.2@2022.5,2440.06 2022.5,2502.5 2160,2640 v1(2170,2640) ; v1(3415,3120) 3415,3145 3505.75,3235.75 3577.74,3235.75 3595.75,3217.74 3595.75,3217.61 3614.97,3198.39 3666.52,3198.39 3677.13,3209 3679.34,3209 3698.9,3228.56 U1.49@3698.9,3230.11 3700.45,3230.11 3760.34,3290 4060,3290 4174,3176 4174,3046 P1.25@4240,2980
  Top Layer w30: P1.25@4240,2980 P1.26@4340,2980
  Bottom Layer w10: v1(2170,2640) 2271,2741 2674.05,2741 2676.75,2738.3 2715,2738.3 2719.15,2742.45 2719.15,2749.15 3179.15,2749.15 3183.25,2753.25 3183.25,2890.58 3214.28,2921.61 3214.89,2921.61 3324.25,3030.97 3324.25,3132.74 3351.52,3160 3390,3160 3415,3135 v1(3415,3120)
JTDI: JTAG1.5 P1.23 P1.24 R3.2 U1.50 | length 3317.9
  Top Layer w8: v1(3400,3062.2) 3385.25,3076.94 3385.25,3125 3385,3125.25 3385,3170 3469.75,3254.75 3585.61,3254.75 3614.75,3225.61 3614.75,3225.48 3622.84,3217.39 3658.65,3217.39 3669.26,3228 3671.47,3228 3679.9,3236.43 3679.9,3239.45 3684.49,3244.03 U1.50@3684.98,3244.03
  Top Layer w10: JTAG1.5@1820,2240 2022.44,2240 R3.2@2022.5,2240.06 2090.74,2308.31 2185.02,2308.31 2417.14,2540.43 2715,2540.43 2740.43,2515 v1(2750,2515) ; U1.50@3694.98,3252.93 3755,3312.95 3755,3315 4073.28,3315 4194,3194.28 4194,3126 P1.23@4240,3080
  Top Layer w30: P1.23@4240,3080 P1.24@4340,3080
  Bottom Layer w8: v1(2750,2515) 2950.16,2515 3075.16,2640 3130,2640 3220.25,2730.25 3220.25,2875.25 3229.61,2884.61 3230.22,2884.61 3400,3054.39 v1(3400,3062.2)
JTDO: JTAG1.13 P1.13 P1.14 R5.2 U1.55 | length 3215.6
  Top Layer w8: v1(3355,3120) 3355,3177.93 3445.93,3268.86 3445.93,3269.07 3449.62,3272.75 3574.51,3272.75 U1.55@3615.38,3313.63 3717.76,3416 4076,3416 P1.13@4240,3580
  Top Layer w10: JTAG1.13@1820,2640 2022.44,2640 R5.2@2022.5,2640.06
  Top Layer w30: P1.13@4240,3580 P1.14@4340,3580
  Bottom Layer w8: v1(1960,2645) 2055,2550 2955,2550 3065,2660 3121.46,2660 3202.25,2740.8 3202.25,2882.71 3222.15,2902.61 3222.76,2902.61 3355,3034.85 v1(3355,3120)
JTMS: JTAG1.7 P1.27 P1.28 R4.2 U1.46 | length 3143.2
  Top Layer w10: JTAG1.7@1820,2340 2022.44,2340 R4.2@2022.5,2340.06 2022.5,2372.5 2040,2390 2135,2390 2190,2445 v1(2190,2450) ; U1.46@3671.06,3102.05 3893.11,2880 v1(3920,2880) P1.27@4240,2880
  Top Layer w30: P1.27@4240,2880 P1.28@4340,2880
  Bottom Layer w10: v1(2190,2450) 2199.57,2440.43 2904.57,2440.43 2910,2435 2938.48,2435 2976.74,2473.26 2976.74,2514.71 3056.56,2594.53 3229.53,2594.53 3366,2731 3567.87,2731 3716.87,2880 v1(3920,2880)
JTRST: JTAG1.3 P1.11 P1.12 R2.2 U1.56 | length 3295.1
  Top Layer w10: JTAG1.3@1820,2140 R2.2@2022.44,2140 ; R2.2@2022.5,2140.06 R2.2@2022.44,2140 ; v1(3145,2795) 3137.67,2795 2790.17,2447.5 2352.5,2447.5 2085,2180 2045,2180 2022.44,2157.44 R2.2@2022.44,2140 ; v1(3335,3200) 3426.75,3291.75 3565.67,3291.75 U1.56@3601.47,3327.55 3601.47,3328.51 3707.95,3435 3995,3435 P1.11@4240,3680
  Top Layer w30: P1.11@4240,3680 P1.12@4340,3680
  Bottom Layer w10: v1(3145,2795) 3145,2880.61 3206,2941.61 3206.61,2941.61 3304.25,3039.25 3304.25,3141.02 3335,3171.77 v1(3335,3200)
KEY0: K2.1 P3.15 P3.16 U1.38 | length 2168.5
  Top Layer w8: U1.38@3559.71,2990.7 3775,2775.4 P3.16@3775,2550
  Top Layer w15: K2.1@2839.96,1745 2875,1745 3120,1990 3755,1990 3840,2075 3840,2305 3775,2370 P3.15@3775,2450
  Top Layer w30: P3.15@3775,2450 P3.16@3775,2550
KEY1: K3.1 P3.17 P3.18 U1.39 | length 1619.6
  Top Layer w8: U1.39@3573.63,3004.62 3875,2703.24 P3.18@3875,2550
  Top Layer w15: K3.1@3469.97,1745 3669.97,1945 3785,1945 3875,2035 P3.17@3875,2450
  Top Layer w30: P3.17@3875,2450 P3.18@3875,2550
KEY2: K4.1 P1.39 P1.40 U1.40 | length 1744.9
  Top Layer w8: U1.40@3587.55,3018.53 3587.55,3017.45 4180,2425 4180,2340 P1.39@4239.57,2280.43
  Top Layer w15: K4.1@4099.99,1745 4099.99,2214.99 4165.43,2280.43 P1.39@4239.57,2280.43
  Top Layer w30: P1.39@4239.57,2280.43 P1.40@4339.57,2280.43
KEY3: K5.1 P1.37 P1.38 U1.41 | length 1822.3
  Top Layer w8: U1.41@3601.47,3032.45 4239.57,2394.34 P1.37@4239.57,2380.43
  Top Layer w15: v1(4615,1885) 4730,1770 K5.1@4730,1745
  Top Layer w30: P1.37@4239.57,2380.43 P1.38@4339.57,2380.43
  Bottom Layer w30: P1.38@4339.57,2380.43 4354.57,2380.43 4615,2120 v1(4615,1885)
LED0: P2.39 P2.40 R35.1 U1.30 | length 1439.4
  Top Layer w8: P2.40@2654.57,2295.43 2655,2295 2712.53,2295 ; 2718.27,2300.75 3283.11,2865.59 3283.11,2870 U1.30@3362.05,2948.94
  Top Layer w10: 2712.53,2295 3028.18,2295 R35.1@3064.09,2259.09
  Top Layer w30: P2.39@2554.57,2295.43 P2.40@2654.57,2295.43
LED1: P2.37 P2.38 R36.1 U1.29 | length 1724.8
  Top Layer w8: P2.38@2654.57,2395.43 2787.5,2395.43 3247.5,2855.43 3247.5,2862.5 3347.86,2962.86 U1.29@3348.13,2962.86
  Top Layer w10: v1(2820,2340) 3223.18,2340 R36.1@3304.09,2259.09
  Top Layer w30: P2.37@2554.57,2395.43 P2.38@2654.57,2395.43
  Bottom Layer w8: P2.38@2654.57,2395.43 2707.21,2377.79 v1(2820,2340)
LED2: P3.5 P3.6 R37.1 U1.33 | length 940.8
  Top Layer w8: P3.6@3275,2550 3545,2820 3545,2868.73 3496.71,2917.02 3494.19,2917.02 U1.33@3490.11,2921.1
  Top Layer w15: P3.5@3275,2450 3275,2415 3415,2275 3493.18,2275 R37.1@3509.09,2259.09
  Top Layer w30: P3.5@3275,2450 P3.6@3275,2550
LED3: P3.13 P3.14 R38.1 U1.37 | length 812.3
  Top Layer w8: U1.37@3545.79,2976.78 3675,2847.56 P3.14@3675,2550
  Top Layer w15: P3.13@3675,2450 3675,2358.18 R38.1@3774.09,2259.09
  Top Layer w30: P3.13@3675,2450 P3.14@3675,2550
LEDA: R30.2 U3.27 | length 573.6
  Top Layer w10: U3.27@4786.73,3485.75 4875.75,3485.75 v1(4880,3490)
  Bottom Layer w10: v1(4880,3490) 4945,3555 5015,3555 5050,3590 5050,3805 5032.5,3822.5 R30.2@5032.5,3849.94